# Altium PCB Qwiic Pressure Sensor - LPS25HB.PcbDoc
Units mil, origin at the board's own origin, x right, y up, seen from the top; angles counter-clockwise.
Board outline 1000 x 1000 mil, 2 copper layers (Top, Bottom); 58 components, 10 nets, 63 pads, 17 vias.
Unrouted connection lines stored in the file: 1.
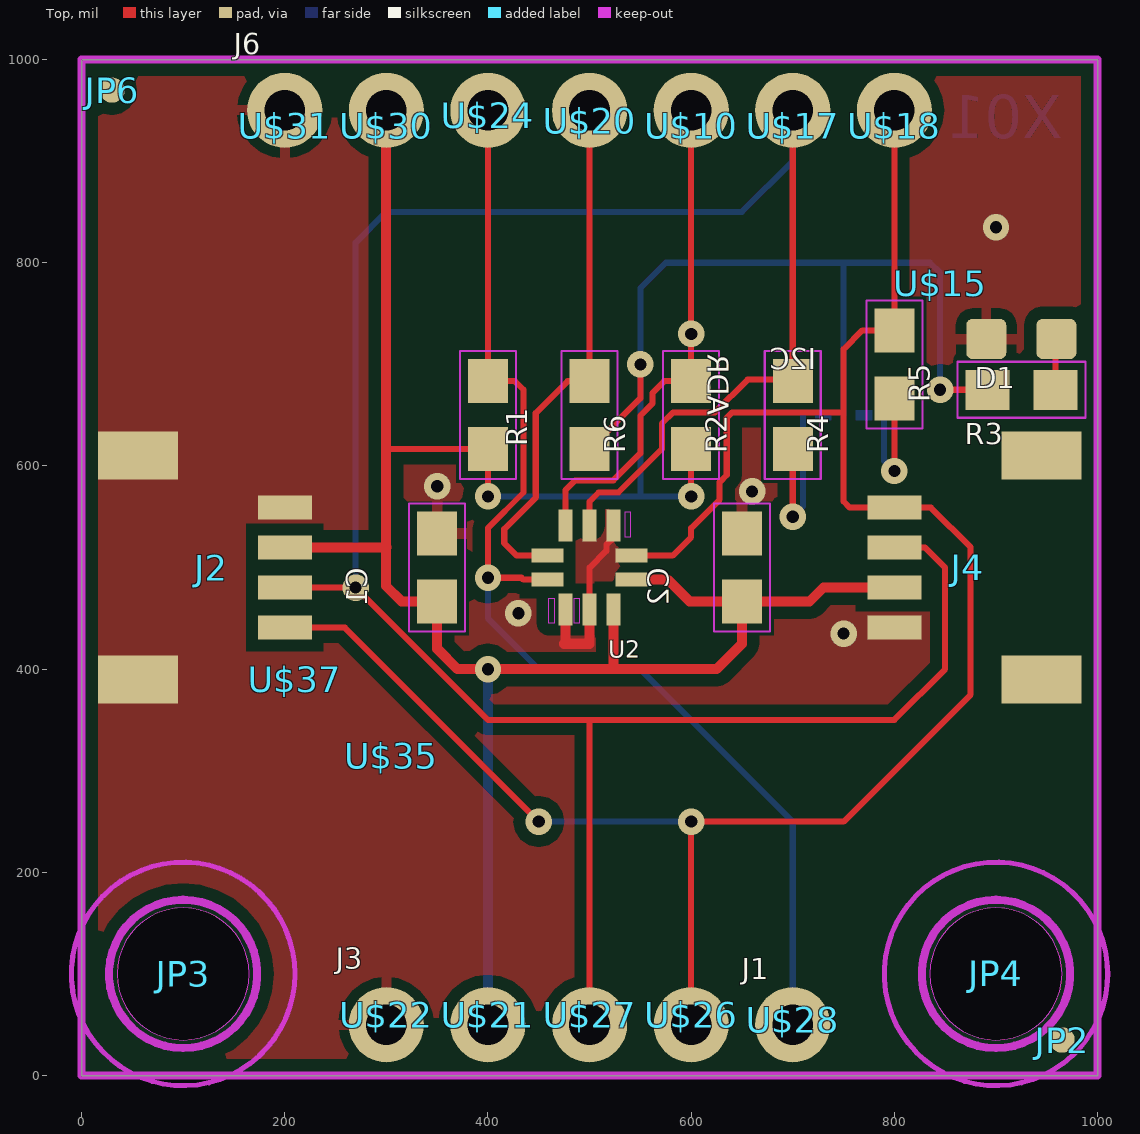
[diagram p0: Top view]
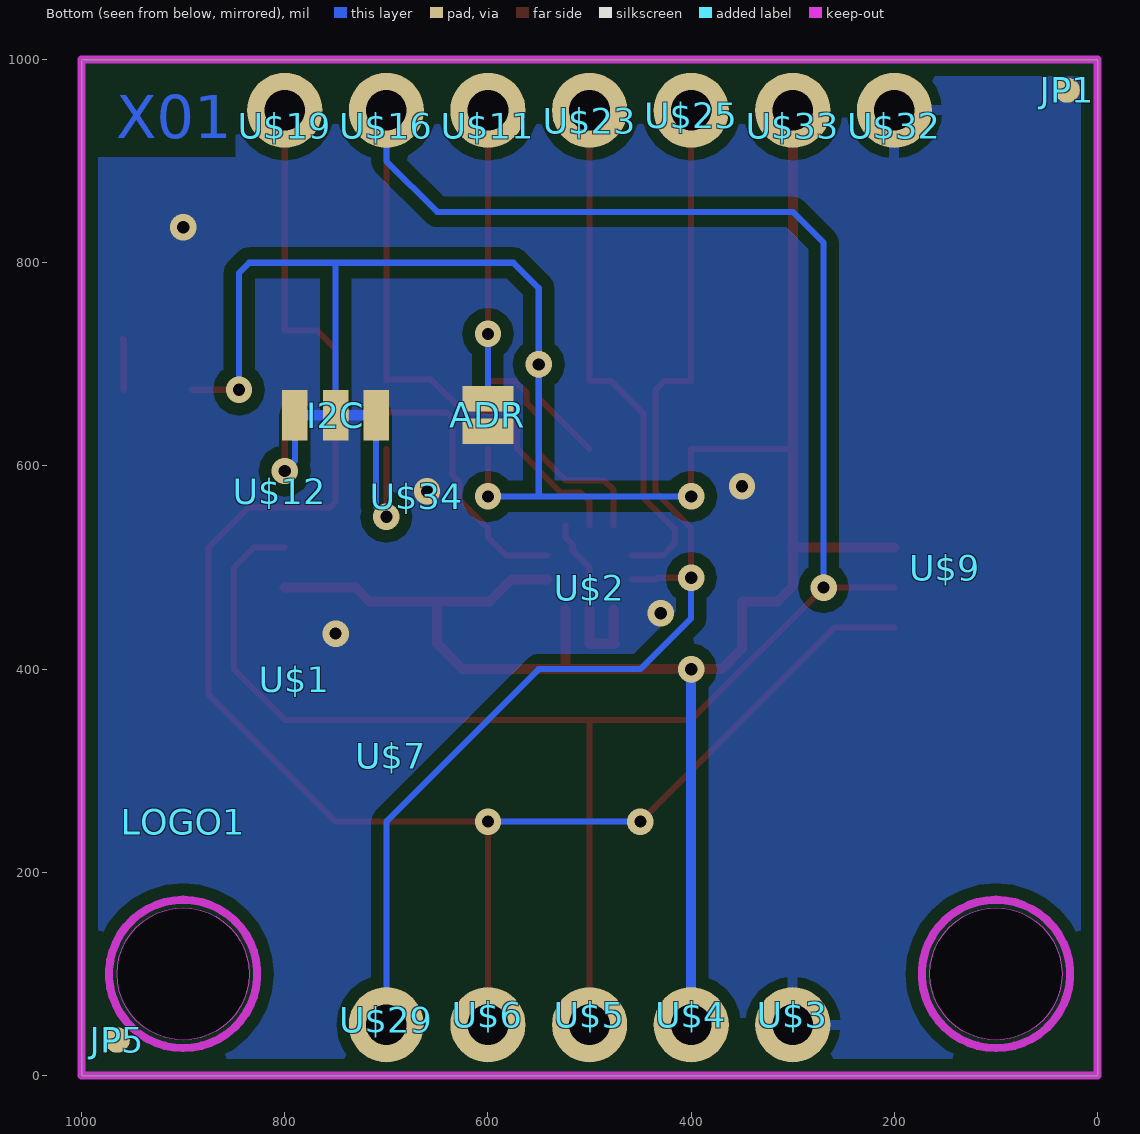
[diagram p1: Bottom view, seen from below]

## Layer stack, top to bottom
Top Solder: solder mask 0.4, Solder Resist, Dk 3.5
Top: signal copper 1.378
Dielectric 1: dielectric 12.6, FR-4, Dk 4.8
Bottom: signal copper 1.378
Bottom Solder: solder mask 0.4, Solder Resist, Dk 3.5

## Board outline
1000,0 0,0 0,1000 1000,1000
cut-out: 900,35 ccw(c900,100) 965,100 ccw(c900,100) 900,165 ccw(c900,100) 835,100 ccw(c900,100)
cut-out: 100,35 ccw(c100,100) 165,100 ccw(c100,100) 100,165 ccw(c100,100) 35,100 ccw(c100,100)

## Design rules (kind name [scope] priority, off if disabled: settings)
BoardOutlineClearance mdCopperDimension [All] p1: gap=10 ignorepadtopadclearanceinfootprint=FALSE except(0: Arc-SplitContinuation Track-SplitContinuation SMDPad-SplitContinuation THPad-SplitContinuation Via-SplitContinuation Fill-SplitContinuation Poly-SplitContinuation Region-SplitContinuation Text-SplitContinuation; 6: Poly-OutlineEdge Poly-CavityEdge Poly-CutoutEdge Poly-SplitBarrior)
Clearance Clearance_for_PolygonClass_Isolate_12 [InPolygonClass('Isolate_12') vs IsArc Or IsTrack Or IsPad Or IsVia Or IsFill Or IsRegion Or IsText] p1: gap=12 ignorepadtopadclearanceinfootprint=FALSE
Clearance "Clearance (Same Net)" [All] p2: gap=6 ignorepadtopadclearanceinfootprint=FALSE
Clearance [All] p3: gap=6 ignorepadtopadclearanceinfootprint=FALSE
HoleSize HoleSize_For_NetClass_power [InNetClass('power')] p1: absolutevalues=TRUE maxlimit=0 minlimit=0 maxpercent=80.000 minpercent=20.000
HoleSize [All] p2: absolutevalues=TRUE maxlimit=100000 minlimit=11.81 maxpercent=80.000 minpercent=20.000
HoleToHoleClearance mdDrill [All] p1: gap=6 allowstackedmicrovias=TRUE
MinimumSolderMaskSliver [All] p1 off: minsoldermaskwidth=10
PasteMaskExpansion Expansion_SMDPaste_OFF [InPadClass('SMDPaste_OFF')] p1: expansion=0
PasteMaskExpansion mlMinCreamFrame [All] p2: expansion=0
PolygonConnect PolygonConnect_For_PolygonThermal_ON_Width100000_Gap100000 [InPolygonClass('PolygonThermal_ON_Width100000_Gap100000') vs Not IsVia] p1: connectstyle=Relief reliefconductorwidth=10 reliefentries=4 polygonreliefangle="90 Angle" airgapwidth=10
PolygonConnect ThermalVias [IsVia] p2: connectstyle=Direct reliefconductorwidth=10 reliefentries=4 polygonreliefangle="90 Angle" airgapwidth=10
PolygonConnect [All] p3: connectstyle=Relief reliefconductorwidth=10 reliefentries=4 polygonreliefangle="90 Angle" airgapwidth=10
RoutingVias [All] p1: holewidth=11.81 width=25.81 viastyle="Through Hole" minholewidth=11.81 minwidth=25.81 maxholewidth=100 maxwidth=100
SolderMaskExpansion mlMinStopFrame [All] p1: expansion=4 istentingtop=FALSE
Width Width_For_NetClass_power [InNetClass('power')] p1: maxlimit=10 minlimit=8 preferedwidth=8
Width [All] p2: maxlimit=10000 minlimit=6 preferedwidth=6
26 further rules are at their usual default settings.

## Classes and differential pairs
polygon class PolygonThermal_ON_Width100000_Gap100000: Polygon_1_Net_GND Polygon_2_Net_GND
polygon class Isolate_12: Polygon_1_Net_GND Polygon_2_Net_GND
pad class SMDPaste_OFF: ADR-1 ADR-2 I2C-1 I2C-2 I2C-3 JP1-1 JP2-1 JP5-1 JP6-1

## Components (designator, comment, footprint, x,y, rotation, side; value= is the part's Value field where it differs from the comment)
ADR "" SMT-JUMPER_2_NO_SILK 600,650 r90 bottom
C1 "4.7uF" 0603 350,500 r90 top
C2 "0.1uF" 0603 650,500 r90 top
D1 "RED" LED-0603 925,725 r180 top
FRAME1 "" CREATIVE_COMMONS -800,-700 r0 top
I2C "" SMT-JUMPER_3_2-NC_TRACE_SILK 750,650 r180 bottom
J1 "" 1X01_NO_SILK 700,50 r0 top
J2 "" 1X04_1MM_RA 200,500 r270 top
J3 "PTH" 1X04_NO_SILK 300,50 r0 top
J4 "" 1X04_1MM_RA 800,500 r90 top
J6 "" 1X07_NO_SILK 200,950 r0 top
JP1 "" MICRO-FIDUCIAL 30,970 r180 bottom
JP2 "" MICRO-FIDUCIAL 965,35 r0 top
JP3 "" STAND-OFF 100,100 r0 top
JP4 "" STAND-OFF 900,100 r0 top
JP5 "" MICRO-FIDUCIAL 965,35 r180 bottom
JP6 "" MICRO-FIDUCIAL 30,970 r0 top
LOGO1 "" OSHW-LOGO-MINI 900,250 r180 bottom
R1 "10k" 0603 400,650 r270 top
R2 "10k" 0603 600,650 r270 top
R3 "1k" 0603 925,675 r180 top
R4 "2.2k" 0603 700,650 r270 top
R5 "2.2k" 0603 800,700 r270 top
R6 "10k" 0603 500,650 r270 top
U2 "LPS25HB" LPS25HB 500,500 r180 top
U$1 "" QWIIC_PRESSURE1 790,390 r180 bottom
U$2 "" SPARKX-MEDIUM 500,480 r180 bottom
U$3 "" GND1 300,60 r90 bottom
U$4 "" 3#3V2 400,60 r90 bottom
U$5 "" SDA8 500,60 r90 bottom
U$6 "" SCL9 600,60 r90 bottom
U$7 "" LPS25HB0 695,315 r180 bottom
U$9 "" QWIIC-LOGO-MEDIUM 150,500 r180 bottom
U$10 "" MISO 600,935 r270 top
U$11 "" MISO 600,935 r270 bottom
U$12 "" I_SUPER2_C-()-03 805,575 r180 bottom
U$15 "" PWR-()-03 845,780 r0 top
U$16 "" MOSI 700,935 r270 bottom
U$17 "" MOSI 700,935 r270 top
U$18 "" SCK-[) 800,935 r270 top
U$19 "" SCK-[) 800,935 r270 bottom
U$20 "" CS#-[> 500,940 r270 top
U$21 "" 3#3V2 400,60 r90 top
U$22 "" GND1 300,60 r90 top
U$23 "" CS#-[> 500,940 r270 bottom
U$24 "" INT#-[< 400,945 r270 top
U$25 "" INT#-[< 400,945 r270 bottom
U$26 "" SCL9 600,60 r90 top
U$27 "" SDA8 500,60 r90 top
U$28 "" INT#-[< 700,55 r90 top
U$29 "" INT#-[< 700,55 r90 bottom
U$30 "" 3#3V2 300,935 r270 top
U$31 "" GND1 200,935 r270 top
U$32 "" GND1 200,935 r270 bottom
U$33 "" 3#3V2 300,935 r270 bottom
U$34 "" ADR-()-03 670,570 r180 bottom
U$35 "" LPS25HB0 305,315 r0 top
U$37 "" QWIIC_PRESSURE1 210,390 r0 top

## Footprints (in the part's own frame and the unit in brackets; to place one, negate y for a bottom-side part, rotate by r counter-clockwise, add the part's x,y. Pads: shape width x height; smd on the part's side, far side on the other; paste and mask are expansions set on the pad)
1X01_NO_SILK [mil] "1X01_NO_SILK"
  round 74 hole 40: 1(0,0)
1X04_1MM_RA [mm] "1X04_1MM_RA"
  rect 0.6x1.35 smd: 1(-1.5,0) 2(-0.5,0) 3(0.5,0) 4(1.5,0)
  rect 1.2x2 smd: NC1(2.8,-3.675) NC2(-2.8,-3.675)
1X04_NO_SILK [mil] "1X04_NO_SILK"
  round 74 hole 40: 1(0,0) 2(100,0) 3(200,0) 4(300,0)
1X07_NO_SILK [mil] "1X07_NO_SILK"
  round 74 hole 40: 1(0,0) 2(100,0) 3(200,0) 4(300,0) 5(400,0) 6(500,0) 7(600,0)
3#3V2 [mil] "3#3V2"
0603 [mm] "0603"
  rect 1.1x1 smd: 1(-0.85,0) 2(0.85,0)
  Top keep-out lines w0.051: -1.6,0.7 -1.6,-0.7 1.6,-0.7 1.6,0.7 -1.6,0.7
ADR-()-03 [mil] "ADR-()-03"
CREATIVE_COMMONS [mil] "CREATIVE_COMMONS"
CS#-[> [mil] "CS#-[>"
GND1 [mil] "GND1"
I_SUPER2_C-()-03 [mil] "I_SUPER2_C-()-03"
INT#-[< [mil] "INT#-[<"
LED-0603 [mm] "LED-0603"
  rrect30% 1x1 smd: A(-0.877,0) C(0.877,0)
LPS25HB [mil] "LPS25HB"
  rect 31.5x13.78 smd: 1(-41.34,11.81) 2(-41.34,-11.81) 6(41.34,-11.81) 7(41.34,11.81)
  rect 13.78x31.5 smd: 3(-23.62,-41.34) 4(0,-41.34) 5(23.62,-41.34) 8(23.62,41.34) 9(0,41.34) 10(-23.62,41.34)
LPS25HB0 [mil] "LPS25HB0"
MICRO-FIDUCIAL [mil] "MICRO-FIDUCIAL"
  rrect100% 25x25 smd paste+0: 1(0,0)
MISO [mil] "MISO"
MOSI [mil] "MOSI"
OSHW-LOGO-MINI [mil] "OSHW-LOGO-MINI"
PWR-()-03 [mil] "PWR-()-03"
QWIIC-LOGO-MEDIUM [mil] "QWIIC-LOGO-MEDIUM"
QWIIC_PRESSURE1 [mil] "QWIIC_PRESSURE1"
SCK-[) [mil] "SCK-[)"
SCL9 [mil] "SCL9"
SDA8 [mil] "SDA8"
SMT-JUMPER_2_NO_SILK [mil] "SMT-JUMPER_2_NO_SILK"
  rect 25x50 smd paste+0: 1(-16,0) 2(16,0)
SMT-JUMPER_3_2-NC_TRACE_SILK [mil] "SMT-JUMPER_3_2-NC_TRACE_SILK"
  rect 25x50 smd paste+0: 1(-40,0) 2(0,0) 3(40,0)
  Top region: -28,-5 -28,5 -12,5 -12,-5
  Top region: 12,-5 12,5 28,5 28,-5
SPARKX-MEDIUM [mil] "SPARKX-MEDIUM"
STAND-OFF [mil] "STAND-OFF"
  Top keep-out circle w5: c0,0 r110
  Top keep-out lines w8: 0,-73 cw(c0,0) 0,73 cw(c0,0) 0,-73
  Bottom keep-out lines w8: 0,-73 cw(c0,0) 0,73 cw(c0,0) 0,-73

## Part data
ADR: library part SMT-JUMPER_2_NO_SILK, PackageName=SMT-JUMPER_2_NO_SILK
C1 C2 R1 R2 R3 R4 R5 R6: library part 0603, PackageName=0603
D1: library part LED-0603, PackageName=LED-0603
FRAME1: library part CREATIVE_COMMONS, PackageName=CREATIVE_COMMONS
I2C: library part SMT-JUMPER_3_2-NC_TRACE_SILK, PackageName=SMT-JUMPER_3_2-NC_TRACE_SILK
J1: library part 1X01_NO_SILK, PackageName=1X01_NO_SILK
J2 J4: library part 1X04_1MM_RA, PackageName=1X04_1MM_RA
J3: library part 1X04_NO_SILK, PackageName=1X04_NO_SILK
J6: library part 1X07_NO_SILK, PackageName=1X07_NO_SILK
JP1 JP2 JP5 JP6: library part MICRO-FIDUCIAL, PackageName=MICRO-FIDUCIAL
JP3 JP4: library part STAND-OFF, PackageName=STAND-OFF
LOGO1: library part OSHW-LOGO-MINI, PackageName=OSHW-LOGO-MINI
U$1 U$37: library part QWIIC_PRESSURE1, PackageName=QWIIC_PRESSURE1
U$2: library part SPARKX-MEDIUM, PackageName=SPARKX-MEDIUM
U$3 U$22 U$31 U$32: library part GND1, PackageName=GND1
U$4 U$21 U$30 U$33: library part 3#3V2, PackageName=3#3V2
U$5 U$27: library part SDA8, PackageName=SDA8
U$6 U$26: library part SCL9, PackageName=SCL9
U$7 U$35: library part LPS25HB0, PackageName=LPS25HB0
U$9: library part QWIIC-LOGO-MEDIUM, PackageName=QWIIC-LOGO-MEDIUM
U$10 U$11: library part MISO, PackageName=MISO
U$12: library part I_SUPER2_C-()-03, PackageName=I_SUPER2_C-()-03
U$15: library part PWR-()-03, PackageName=PWR-()-03
U$16 U$17: library part MOSI, PackageName=MOSI
U$18 U$19: library part SCK-[), PackageName=SCK-[)
U$20 U$23: library part CS#-[>, PackageName=CS#-[>
U$24 U$25 U$28 U$29: library part INT#-[<, PackageName=INT#-[<
U$34: library part ADR-()-03, PackageName=ADR-()-03
U2: PackageName=LPS25HB

## Free pads (board coordinates)
  round 130 hole 130 unplated: MH1(100,100) MH1(900,100)

## Via types
v1: diameter 26/26 (per signal layer), hole 12, Top to Bottom, 17 vias

## Nets (pads, with @x,y where several pads share a name; then routed paths per layer and width w, separated by ;. In a path a pad name is that pad's centre, name@x,y a point inside that pad or via, vN(x,y) a via of type N, cw(c..) or ccw(c..) an arc to the next point about the centre after c; other vN are vias at no path point)
3.3V: C1.1 C2.1 I2C.2 J2.2 J3.2 J4.2 J6.2 R1.2 R2.2 R3.2 R6.2 U2.1 U2.10 | length 3038.6
  Top w6: 299.69,615 301.22,616.54 R1.2 v1(400,570) ; R6.2 550,666.54 v1(550,700) ; v1(600,570) R2.2 ; v1(845,675) R3.2
  Top w10: J2.2 299.69,519.68 ; 300,520 299.69,519.68 ; J6.2 299.69,949.69 299.69,615 299.69,519.68 ; U2.10 523.62,401.38 525,400 ; U2.1 576.81,488.19 598.46,466.54 C2.1 ; J4.2 730.32,480.32 716.54,466.54 C2.1 ; 299.69,519.68 299.69,481.85 315,466.54 C1.1 350,420 370,400 v1(400,400) 525,400 ; 525,400 625,400 650,425 C2.1
  Bottom w6: v1(400,570) 550,570 ; v1(600,570) 550,570 ; I2C.2 750,800 ; v1(845,675) 845,790 835,800 750,800 ; 550,570 v1(550,700) 550,775 575,800 750,800
  Bottom w10: J3.2 v1(400,400)
!INT: J1.1 J6.3 R1.1 U2.7 | length 1186.8
  Top w6: J6.3 R1.1 426.54,683.46 435,675 435,573.89 400,538.89 v1(400,490) 433.03,490 434.84,488.19 U2.7
  Bottom w6: v1(400,490) 400,450 450,400 550,400 700,250 J1.1
ADDR/MISO: ADR.2 J6.5 R2.1 U2.5 | length 561.4
  Top w6: U2.5 476.38,576.38 485.88,585.88 523.41,585.88 550,612.47 550,649.56 562,661.56 562,672 573.46,683.46 R2.1 v1(600,730) J6.5
  Bottom w6: ADR.2 v1(600,730)
CS: J6.4 R6.1 U2.6 | length 521.1
  Top w6: U2.6 428.19,511.81 416.02,523.99 416.02,537.93 447,568.92 447,652 478.46,683.46 R6.1 J6.4
GND: ADR.1 C1.2 C2.2 D1.C J2.1 J3.1 J4.1 J6.1 U2.3 U2.8 U2.9 | length 185.4
  Top w6: U2.9 500,500 516.59,516.59 516.59,522.43 523.62,529.46 U2.3
  Top w10: U2.8 476.38,426.38 475,425 500,425 U2.9
  other v1: 750,435 430,455 660,575 350,580 900,835
N$1: I2C.1 R5.2 | length 130.7
  Top w6: v1(800,595) R5.2
  Bottom w6: I2C.1 790,605 v1(800,595)
N$2: I2C.3 R4.2 | length 170.7
  Top w6: v1(700,550) R4.2
  Bottom w6: v1(700,550) 710,560 I2C.3
N$3: D1.A R3.1 | length 50.4
  Top w6: R3.1 958.46,723.94 D1.A
SCL/SCK: J2.4 J3.4 J4.4 J6.7 R5.1 U2.2 | length 2035
  Top w6: J2.4 259.06,440.94 v1(450,250) ; U2.2 581.81,511.81 600,530 600,538.89 628,566.89 628,584.11 635,591.11 635,647.43 640.38,652.81 747.81,652.81 750,655 ; J3.4 v1(600,250) 750,250 875,375 875,520 835.94,559.06 J4.4 755.94,559.06 750,565 750,655 ; J6.7 R5.1 768.46,733.46 750,715 750,655
  Bottom w6: v1(450,250) v1(600,250)
SDA/MOSI: J2.3 J3.3 J4.3 J6.6 R4.1 U2.4 | length 2590.4
  Top w6: J2.3 v1(269.69,480.32) 400,350 500,350 ; J3.3 500,350 ; U2.4 500,565 508.88,573.88 528.38,573.88 571.32,616.81 571.32,641.92 582.21,652.81 623.41,652.81 655.6,685 R4.1@700,685 ; R4.1 R4.1@700,685 ; J6.6 R4.1@700,685 ; J4.3 830.32,519.68 850,500 850,400 800,350 500,350
  Bottom w6: v1(269.69,480.32) 269.69,819.68 300,850 650,850 700,900 J6.6
pads on no net: J2.NC1 J2.NC2 J4.NC1 J4.NC2 JP1.1 JP2.1 JP5.1 JP6.1

## Polygon pours and split planes (outlines as drawn)
GND on Bottom "Polygon_1_Net_GND" (solid, remove dead copper, pour order 1): -5,-5 -5,1005 1005,1005 1005,-5
GND on Top "Polygon_2_Net_GND" (solid, remove dead copper, pour order 0): -5,-5 -5,1005 1005,1005 1005,-5

## Keep-outs
Top:
  region: 535,530 535,555 540,555 540,530
  region: 460,445 460,470 465,470 465,445
  region: 485,445 485,470 490,470 490,445
Keep-Out Layer:
  the board outline again, w8

## Other copper
Bottom:
  text "X01" at 965.94,922.38 h42.5

## Silkscreen, mask and mechanical layers (free items; w line width, h text height)
Dimension:
  the board outline again, w8

## Text inside footprints (layer, text, board x,y; h text height)
FRAME1: tDocu "Designed by:" at -350,-700 h59.5; tDocu "https://creativecommons.org/licenses/by-sa/4.0/" at -800,-600 h59.5; tDocu "Released under the Creative Commons Attribution Share-Alike 4.0 License" at -1600,-500 h59.5